# Altium PCB FRONT-UNIT-7_1.PcbDoc (part 3 of 3)
Units mm, origin at the board's own origin, x right, y up, seen from the top; angles counter-clockwise.
Board outline 280 x 128 mm, 2 copper layers (Top Layer, Top, Bottom Layer, Bottom), stack 1.671 mm thick; 140 components, 117 nets, 608 pads, 1302 vias.
Unrouted connection lines stored in the file: 26.
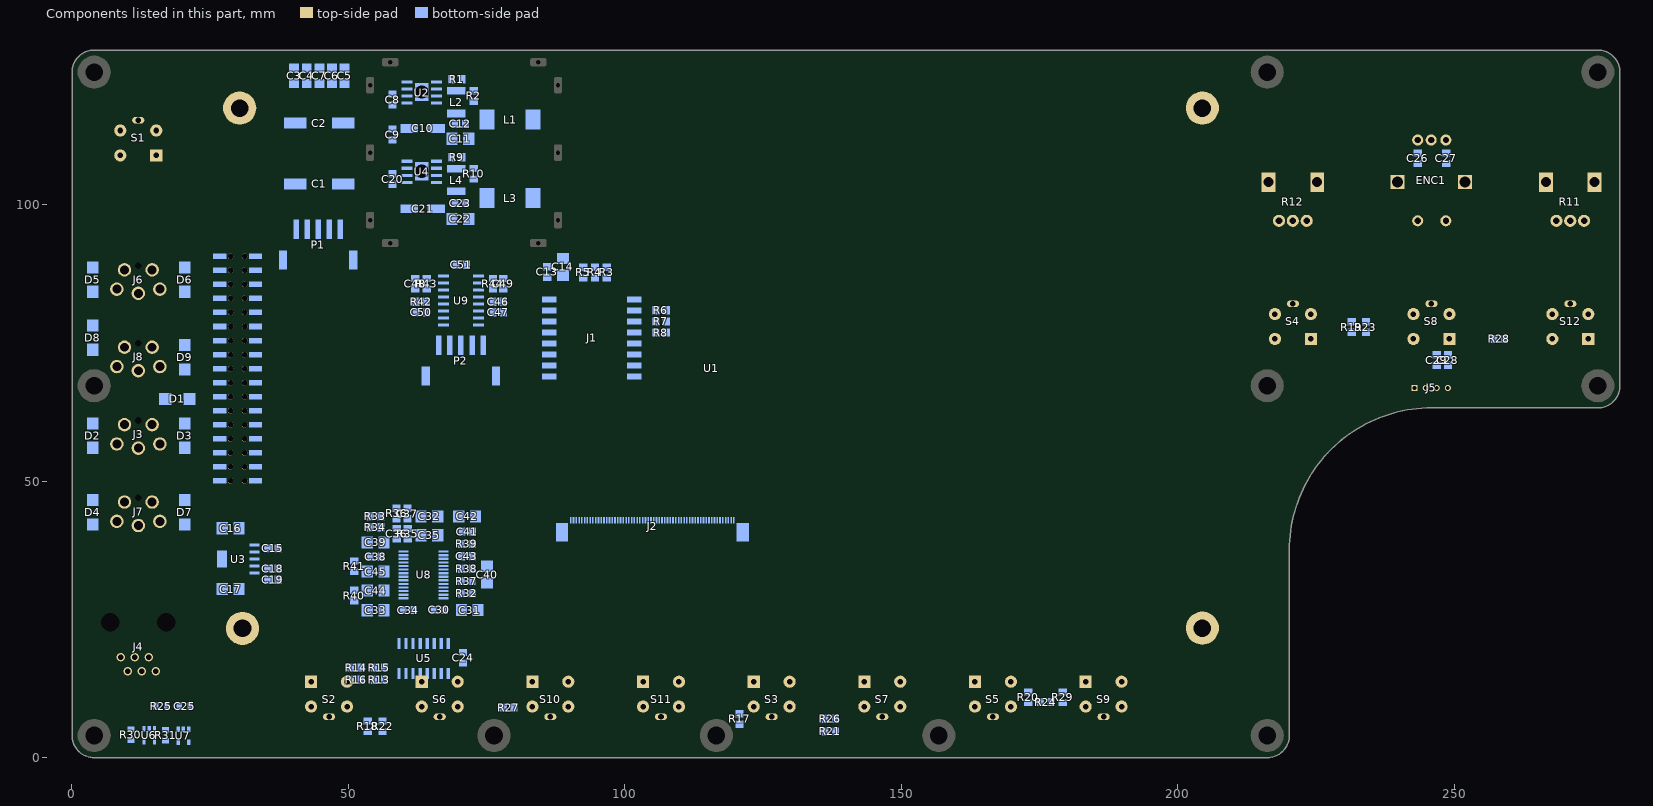
[diagram p3: the components of this part, seen from the top]

## Dimensions (continued)
0,0 to 12,47 on Mechanical 1, Top Assy
0.006,4.013 to 280,128.575 on Mechanical 1, Top Assy
0,128 to 0,0 on Mechanical 1, Top Assy

## Text inside footprints (layer, text, board x,y; h text height)
U1: Top Overlay "RA8875 7' 800*480" at 102.216,76.097 h1.67; Top Overlay "LCD-MODULE" at 106.153,79.78 h1.67